# EAGLE board pi-hat-v.02-sparkfun copy (EAGLE 8.2.2)
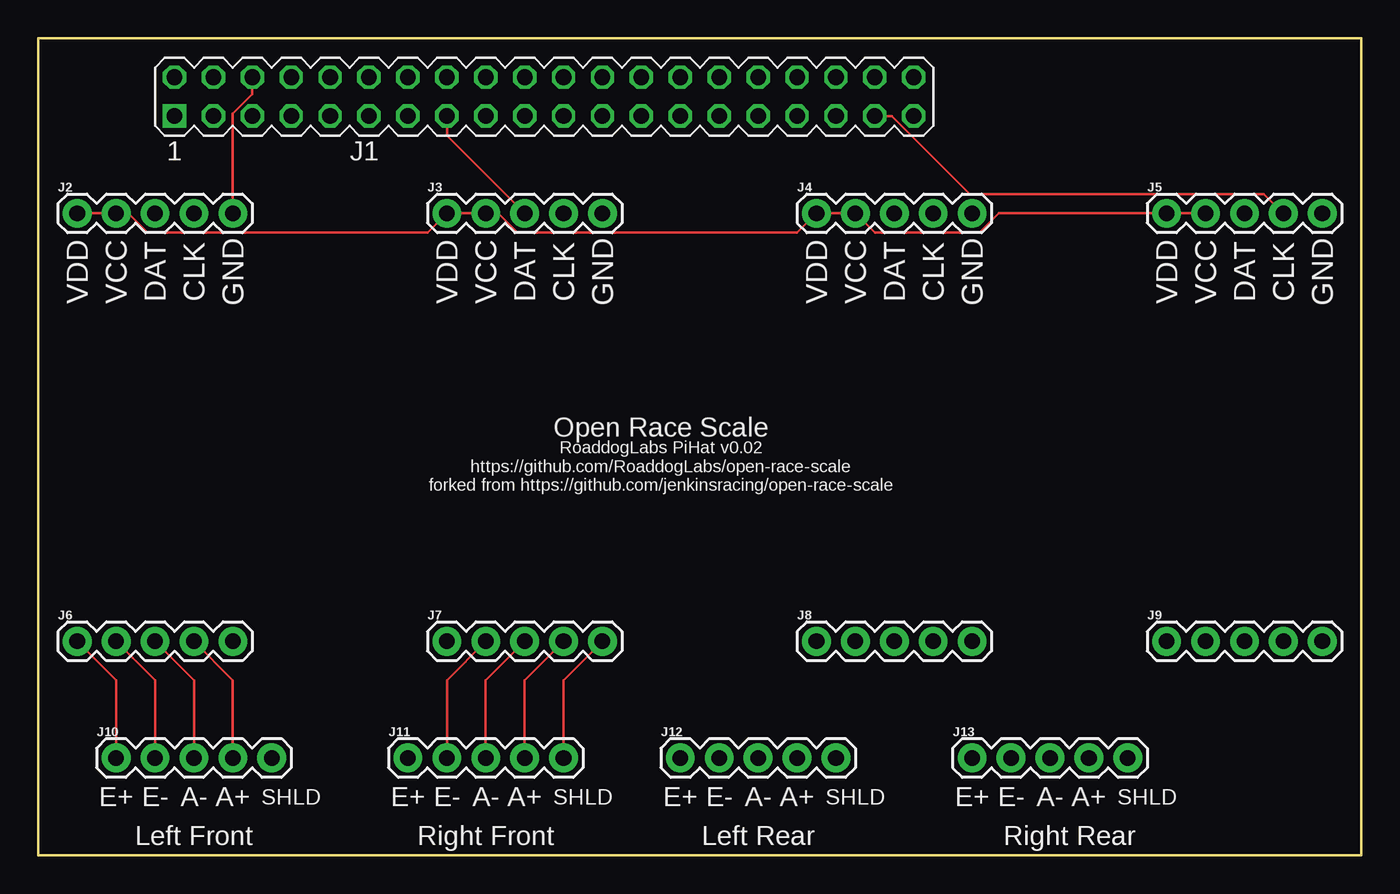
[diagram p0: board, top side]
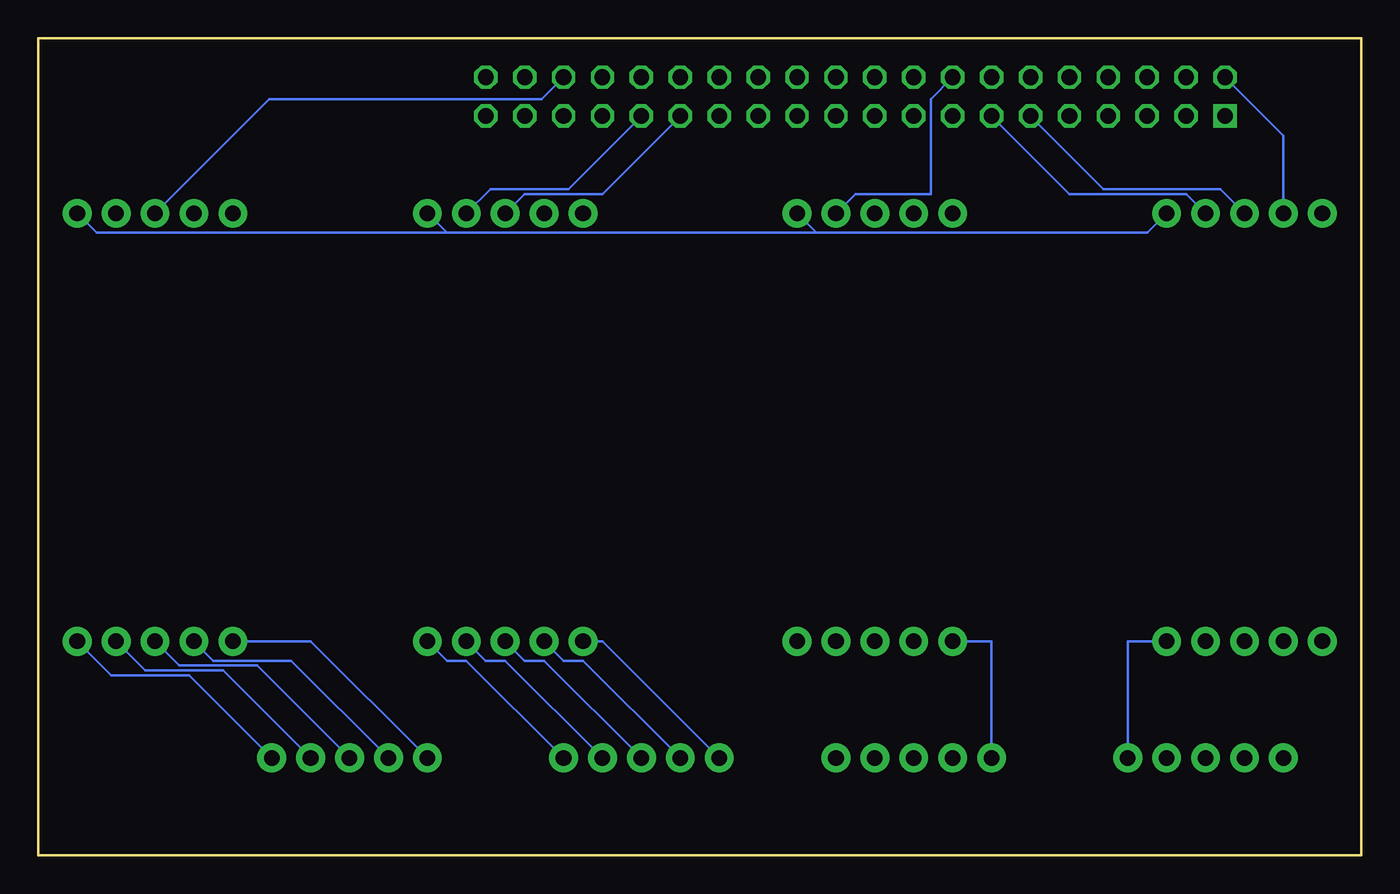
[diagram p1: board, bottom side, seen from below]

Size 86.36 x 53.34 mm. Coordinates in mm from the lower left corner, seen from the top.
Outline: 0,0 86.36,0 86.36,53.34 0,53.34 0,0
Copper layers (1*16): Top 0.035mm / dielectric 1.5mm / Bottom 0.035mm
Design rules "default": minimum track width 6mil, minimum drill 0.35mm, track to track 6mil, track to pad 6mil, pad to pad 6mil, via to via 6mil, smd to smd 6mil, copper to edge 40mil, drill to drill 6mil, minimum pad ring 10mil, minimum via ring 8mil, stop-mask expansion 4mil, vias tented up to drill 0mil, thermal gap 10mil

## Footprints (pad centres in the part's own frame; a part is rotated, then mirrored left to right if it is on the bottom)
PIN_20X2 = drill 1.016 square: 1 -24.13,-1.27 | drill 1.016 octagon: 2 -24.13,1.27; 3 -21.59,-1.27; 4 -21.59,1.27; 5 -19.05,-1.27; 6 -19.05,1.27; 7 -16.51,-1.27; 8 -16.51,1.27; 9 -13.97,-1.27; 10 -13.97,1.27; 11 -11.43,-1.27; 12 -11.43,1.27; 13 -8.89,-1.27; 14 -8.89,1.27; 15 -6.35,-1.27; 16 -6.35,1.27; 17 -3.81,-1.27; 18 -3.81,1.27; 19 -1.27,-1.27; 20 -1.27,1.27; 21 1.27,-1.27; 22 1.27,1.27; 23 3.81,-1.27; 24 3.81,1.27; 25 6.35,-1.27; 26 6.35,1.27; 27 8.89,-1.27; 28 8.89,1.27; 29 11.43,-1.27; 30 11.43,1.27; 31 13.97,-1.27; 32 13.97,1.27; 33 16.51,-1.27; 34 16.51,1.27; 35 19.05,-1.27; 36 19.05,1.27; 37 21.59,-1.27; 38 21.59,1.27; 39 24.13,-1.27; 40 24.13,1.27
1X05 = drill 1.016 pad 1.88: 1 0,0; 2 2.54,0; 3 5.08,0; 4 7.62,0; 5 10.16,0

## Placement (x,y rotation side)
J1  PIN20X2  [PIN_20X2]  33.02,49.53 0 top
J2  [1X05]  2.54,41.91 0 top
J3  [1X05]  26.67,41.91 0 top
J4  [1X05]  50.8,41.91 0 top
J5  [1X05]  73.66,41.91 0 top
J6  [1X05]  2.54,13.97 0 top
J7  [1X05]  26.67,13.97 0 top
J8  [1X05]  50.8,13.97 0 top
J9  [1X05]  73.66,13.97 0 top
J10  [1X05]  5.08,6.35 0 top
J11  [1X05]  24.13,6.35 0 top
J12  [1X05]  41.91,6.35 0 top
J13  [1X05]  60.96,6.35 0 top

## Library data of the parts
J1 = FLYFISH
J2-J13 = SparkFun-Connectors

## Nets
N$1: J6.5 J10.5
N$2: J6.4 J10.4
N$3: J6.3 J10.3
N$4: J6.2 J10.2
N$5: J6.1 J10.1
N$6: J7.5 J11.5
N$7: J7.4 J11.4
N$8: J7.3 J11.3
N$9: J7.2 J11.2
N$10: J7.1 J11.1
N$11: J8.5 J12.5
N$12: J8.4 J12.4
N$13: J8.3 J12.3
N$14: J8.2 J12.2
N$15: J8.1 J12.1
N$16: J9.5 J13.5
N$17: J1.2 J2.1 J2.2 J3.1 J3.2 J4.1 J4.2 J5.1 J5.2
N$18: J1.6 J2.5 J3.5 J4.5 J5.5
N$19: J1.11 J2.3
N$20: J1.13 J2.4
N$21: J1.15 J3.3
N$22: J1.16 J3.4
N$23: J1.37 J5.4
N$24: J1.36 J5.3
N$25: J1.31 J4.4
N$26: J1.29 J4.3
N$27: J9.4 J13.4
N$28: J9.3 J13.3
N$29: J9.2 J13.2
N$30: J9.1 J13.1

## Tracks (layer width: path | path; a pad name or v marks a point on that pad's centre or on a via)
N$1
  Bottom 0.152: J10.5 15.24,13.97 J6.5
N$2
  Top 0.152: J10.4 12.7,11.43 J6.4
N$3
  Top 0.152: J10.3 10.16,11.43 J6.3
N$4
  Top 0.152: J10.2 7.62,11.43 J6.2
N$5
  Top 0.152: J10.1 5.08,11.43 J6.1
N$6
  Top 0.152: J11.5 34.29,11.43 J7.5
N$7
  Top 0.152: J11.4 31.75,11.43 J7.4
N$8
  Top 0.152: J11.3 29.21,11.43 J7.3
N$9
  Top 0.152: J11.2 26.67,11.43 J7.2
N$10
  Bottom 0.152: J11.1 24.13,13.97 J7.1
N$11
  Bottom 0.152: J12.5 58.42,12.7 59.69,12.7 J8.5
N$12
  Bottom 0.152: J12.4 55.88,12.7 57.15,12.7 J8.4
N$13
  Bottom 0.152: J12.3 53.34,12.7 54.61,12.7 J8.3
N$14
  Bottom 0.152: J12.2 50.8,12.7 52.07,12.7 J8.2
N$15
  Bottom 0.152: J12.1 49.53,13.97 J8.1
N$16
  Bottom 0.152: J13.5 76.52,11.75 81.6,11.75 J9.5
N$17
  Top 0.152: J2.1 J2.2 5.87,41.91 7.14,40.64 25.4,40.64 J3.1 J3.2 30,41.91 31.27,40.64 49.53,40.64 J4.1 J4.2 54.61,40.64 61.44,40.64 62.71,41.91 J5.1 J5.2
  Bottom 0.152: J1.2 5.08,46.99 J2.2
N$18
  Top 0.152: J1.6 13.97,49.69 12.7,48.42 J2.5
  Bottom 0.152: 35.56,40.64 J3.5 | 35.56,40.64 13.97,40.64 J2.5 | 59.69,40.64 J4.5 | 35.56,40.64 59.69,40.64 | J5.5 82.55,40.64 59.69,40.64
N$19
  Bottom 0.152: J1.11 16.83,43.5 9.21,43.5 J2.3
N$20
  Bottom 0.152: J1.13 19.05,43.18 11.43,43.18 J2.4
N$21
  Top 0.152: J1.15 26.67,46.99 J3.3
N$22
  Bottom 0.152: J1.16 28.1,49.37 28.1,43.18 33.02,43.18 J3.4
N$23
  Top 0.152: J1.37 55.72,48.26 60.8,43.18 80.01,43.18 J5.4
N$24
  Bottom 0.152: J1.36 53.5,49.37 71.28,49.37 J5.3
N$25
  Bottom 0.152: J1.31 51.75,43.5 56.83,43.5 J4.4
N$26
  Bottom 0.152: J1.29 49.53,43.18 54.61,43.18 J4.3
N$27
  Bottom 0.152: J13.4 74.3,12.06 79.38,12.06 J9.4
N$28
  Bottom 0.152: J13.3 72.07,12.38 77.15,12.38 J9.3
N$29
  Bottom 0.152: J13.2 69.85,12.7 74.93,12.7 J9.2
N$30
  Bottom 0.152: J13.1 68.58,13.97 J9.1

## Text on the board
tPlace: VDD | VCC | DAT | CLK | GND | VDD | VCC | DAT | CLK | GND | VDD | VCC | DAT | CLK | GND | VDD | VCC | DAT | CLK | GND | Open Race Scale | RoaddogLabs PiHat v0.02 / https://github.com/RoaddogLabs/open-race-scale / forked from https://github.com/jenkinsracing/open-race-scale | E+ | E- | A- | A+ | SHLD | E+ | E- | A- | A+ | SHLD | E+ | E- | A- | A+ | SHLD | E+ | E- | A- | A+ | SHLD | Left Front | Right Front | Left Rear | Right Rear